# EAGLE board Simon-reference (EAGLE 7.2.0)
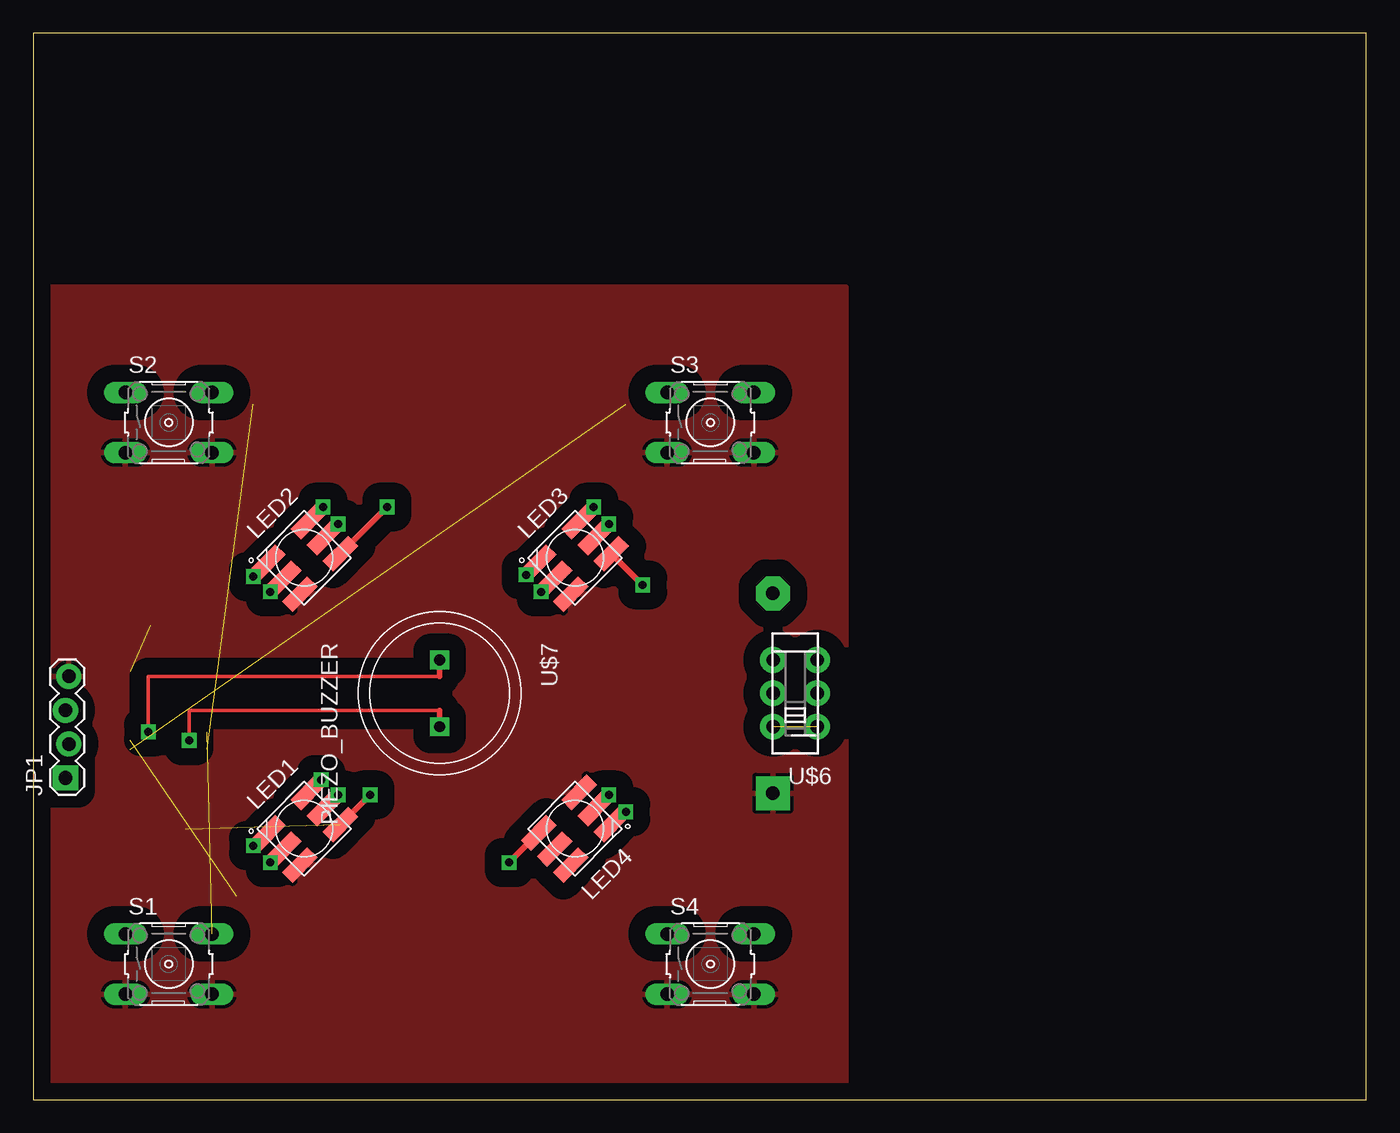
[diagram p0: board, top side]
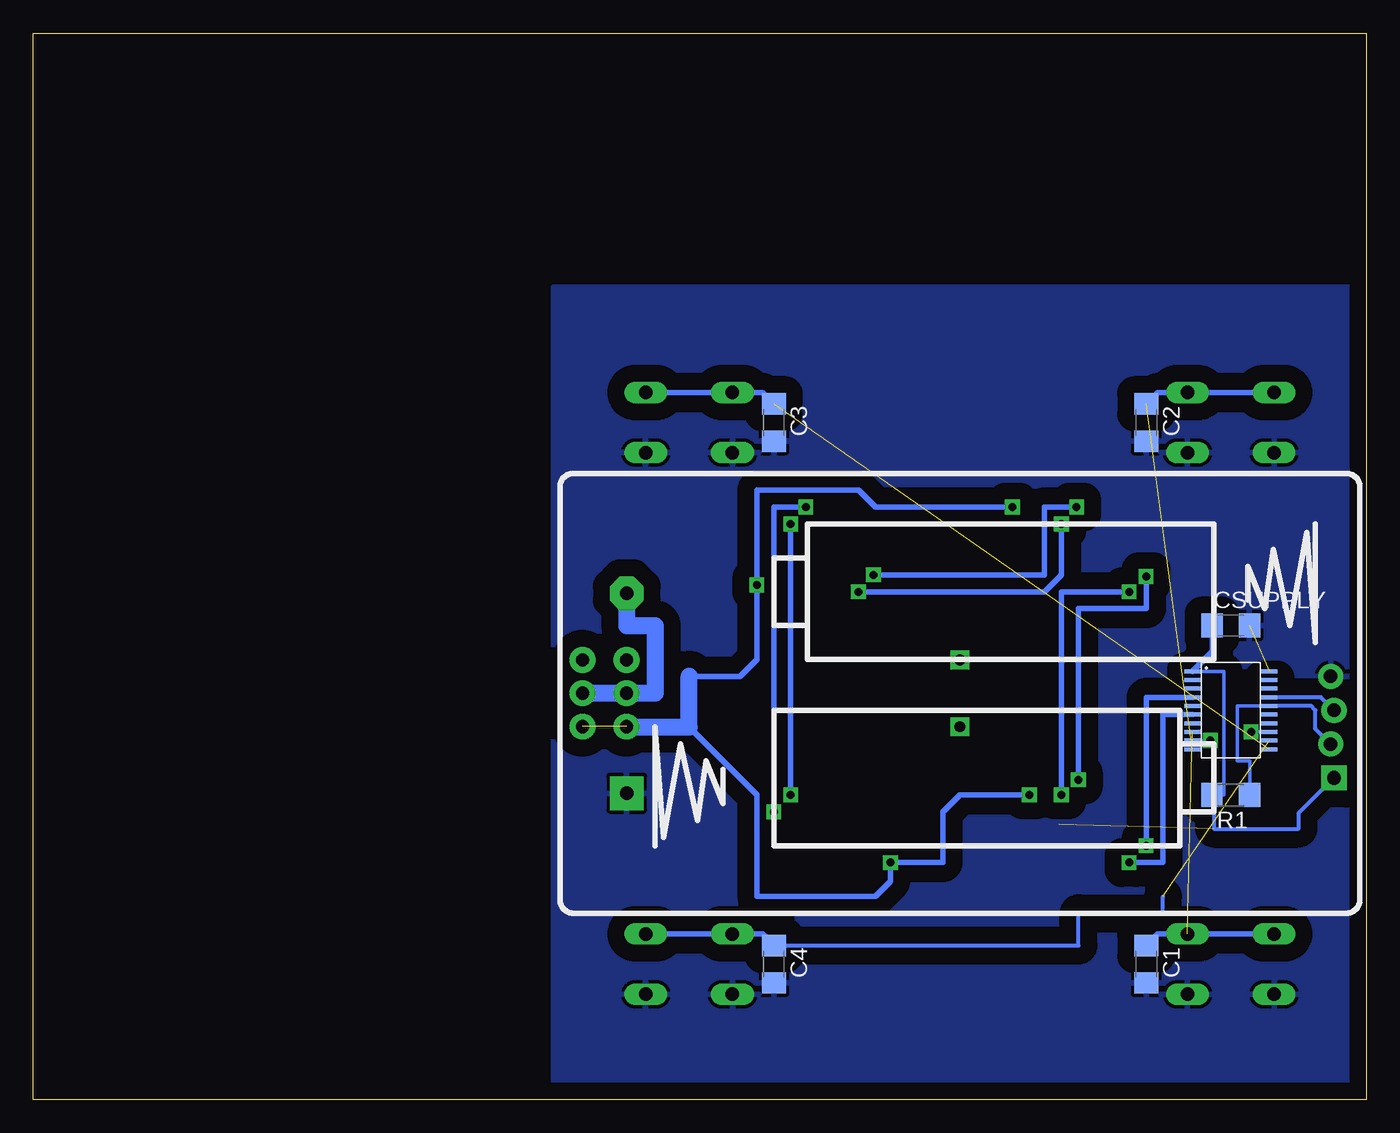
[diagram p1: board, bottom side, seen from below]

Size 100 x 80 mm. Coordinates in mm from the lower left corner, seen from the top.
Outline: 0,0 100,0 100,80 0,80 0,0
Copper layers (1*16): Top 0.035mm / dielectric 1.5mm / Bottom 0.035mm
Design rules "AdvancedCircuitsBarebones": minimum track width 6mil, minimum drill 20mil, track to track 6mil, track to pad 6mil, pad to pad 6mil, via to via 6mil, smd to smd 6mil, copper to edge 10mil, drill to drill 6mil, minimum pad ring 12mil, minimum via ring 10mil, stop-mask expansion 4mil, vias tented up to drill 25mil, thermal gap 10mil

## Footprints (pad centres in the part's own frame; a part is rotated, then mirrored left to right if it is on the bottom)
BATTERY_PACK_2AA = drill 1 pad 2.54 octagon: 3V 7.5,25 | drill 1 pad 2.54 square: GND -7.5,25
C1206 = smd 1.6 x 1.8: 1 -1.4,0; 2 1.4,0
1X04_LOCK = drill 1.016 pad 1.88 square: 1 0,0.127 | drill 1.016 pad 1.88: 2 2.54,-0.127; 3 5.08,0.127; 4 7.62,-0.127
5050 = smd 2.68 x 1.1: 1 -2.15,1.7; 2 -2.15,0; 3 -2.15,-1.7; 4 2.15,-1.7; 5 2.15,0; 6 2.15,1.7
R1206 = smd 1.6 x 1.803: 1 -1.422,0; 2 1.422,0
B3F-10XX = drill 1.016 long: 1 -3.251,2.261; 2 3.251,2.261; 3 -3.251,-2.261; 4 3.251,-2.261
PW20 = smd 0.3 x 1.2: 1 -2.925,-2.9; 2 -2.275,-2.9; 3 -1.625,-2.9; 4 -0.975,-2.9; 5 -0.325,-2.9; 6 0.325,-2.9; 7 0.975,-2.9; 8 1.625,-2.9; 9 2.275,-2.9; 10 2.925,-2.9; 11 2.925,2.9; 12 2.275,2.9; 13 1.625,2.9; 14 0.975,2.9; 15 0.325,2.9; 16 -0.325,2.9; 17 -0.975,2.9; 18 -1.625,2.9; 19 -2.275,2.9; 20 -2.925,2.9
JS_DPDT_TH = drill 1 pad 1.93: 1 -2.5,-1.65; 2 0,-1.65; 3 2.5,-1.65; 4 -2.5,1.65; 5 0,1.65; 6 2.5,1.65
PIEZO_BUZZER = drill 0.8 square: P$1 -2.5,0; P$2 2.5,0

## Placement (x,y rotation side)
BAT1  [BATTERY_PACK_2AA]  30.48,30.48 90 bottom
C1  [C1206]  16.51,10.16 270 bottom
C2  [C1206]  16.51,50.8 270 bottom
C3  [C1206]  44.45,50.8 270 bottom
C4  [C1206]  44.45,10.16 270 bottom
CSUPPLY  [C1206]  10.16,35.56 0 bottom
JP1  [1X04_LOCK]  2.54,24.13 90 top
LED1  APA102  [5050]  20.32,20.32 45 top
LED2  APA102  [5050]  20.32,40.64 45 top
LED3  APA102  [5050]  40.64,40.64 45 top
LED4  APA102  [5050]  40.64,20.32 225 top
R1  [R1206]  10.16,22.86 180 bottom
S1  [B3F-10XX]  10.16,10.16 0 top
S2  [B3F-10XX]  10.16,50.8 0 top
S3  [B3F-10XX]  50.8,50.8 0 top
S4  [B3F-10XX]  50.8,10.16 0 top
U$1  MSP430G2XX3TSSOP  [PW20]  10.16,29.21 270 bottom
U$6  SWITCH_DPDT  [JS_DPDT_TH]  57.15,30.48 90 top
U$7  PIEZO_BUZZER  [PIEZO_BUZZER]  30.48,30.48 270 top

## Library data of the parts
BAT1 LED1-LED4 U$1 U$6 U$7 = ELEC327
C1-C4 CSUPPLY = rcl
JP1 = SparkFun
R1 = resistor
S1-S4 = switch-omron; MPN: B3F-1000; OC_FARNELL: 176432; OC_NEWARK: 36M3542

## Nets
BAT_VCC: BAT1.3V U$6.2 U$6.5
GND: BAT1.GND C1.2 C2.2 C3.2 C4.2 CSUPPLY.2 JP1.4 LED1.3 LED2.3 LED3.3 LED4.3 S1.3 S1.4 S2.3 S2.4 S3.3 S3.4 S4.3 S4.4 U$1.20
N$1: LED1.6 LED2.1
N$2: LED1.5 LED2.2
N$3: LED2.6 LED3.1
N$4: LED2.5 LED3.2
N$5: LED3.6 LED4.1
N$6: LED3.5 LED4.2
N$7: LED1.1 U$1.4
N$8: LED1.2 U$1.6
N$10: U$1.9 U$7.P$2
N$11: U$1.13 U$7.P$1
N$13: C1.1 S1.1 S1.2 U$1.8
N$14: C2.1 S2.1 S2.2 U$1.10
N$15: C3.1 S3.1 S3.2 U$1.11
N$16: C4.1 S4.1 S4.2 U$1.12
RST: JP1.2 R1.1 U$1.16
TEST: JP1.3 U$1.17
VCC: CSUPPLY.1 JP1.1 LED1.4 LED2.4 LED3.4 LED4.4 R1.2 U$1.1 U$6.1 U$6.4

## Tracks (layer width: path | path; a pad name or v marks a point on that pad's centre or on a via)
BAT_VCC
  Bottom 1.27: BAT1.3V 55.48,35.56 53.34,35.56 53.34,30.48 U$6.5 U$6.2
GND  (1 unrouted)
  pour Top (isolate 1.27): 0,0 0,60.96 60.96,60.96 60.96,0
  pour Bottom (isolate 1.27): 0,60.96 60.96,60.96 60.96,0 0,0
N$1  (via drill 0.6)
  Top 0.406: LED1.6 v21.59,23.99 | LED2.1 v16.51,39.23
  Bottom 0.406: v21.59,23.99 21.59,36.83 16.51,36.83 v16.51,39.23
N$2  (via drill 0.6)
  Top 0.406: LED1.5 v22.86,22.86 | LED2.2 v17.78,38.1
  Bottom 0.406: v22.86,22.86 22.86,38.1 v17.78,38.1
N$3  (via drill 0.6)
  Top 0.406: LED2.6 v21.73,44.45 | LED3.1 v36.97,39.37
  Bottom 0.406: v36.97,39.37 24.13,39.37 24.13,44.45 v21.73,44.45
N$4  (via drill 0.6)
  Top 0.406: LED2.5 v22.86,43.18 | LED3.2 v38.1,38.1
  Bottom 0.406: v22.86,43.18 22.86,39.37 24.13,38.1 v38.1,38.1
N$5  (via drill 0.6)
  Top 0.406: LED3.6 v42.05,44.45 | v44.45,21.59 43.5,20.64 LED4.1
  Bottom 0.406: v42.05,44.45 44.45,44.45 v44.45,21.59
N$6  (via drill 0.6)
  Top 0.406: LED3.5 v43.18,43.18 | LED4.2 v43.18,22.86
  Bottom 0.406: v43.18,43.18 v43.18,22.86
N$7  (via drill 0.6)
  Top 0.406: LED1.1 16.65,19.05 v16.51,19.05
  Bottom 0.406: U$1.4 16.51,30.18 v16.51,19.05
N$8  (via drill 0.6)
  Top 0.406: LED1.2 v17.78,17.78
  Bottom 0.406: U$1.6 15.24,28.89 15.24,17.78 v17.78,17.78
N$10  (via drill 0.6)
  Top 0.254: 30.48,29.21 11.68,29.21 v11.68,26.93
  Top 0.406: U$7.P$2 30.48,29.21
  Bottom 0.254: U$1.9 v11.68,26.93
N$11  (via drill 0.6)
  Top 0.254: 30.48,31.75 8.64,31.75 v8.64,27.59
  Top 0.406: U$7.P$1 30.48,31.75
  Bottom 0.254: U$1.13 v8.64,27.59
N$13  (1 unrouted)
  Bottom 0.406: C1.1 15.65,12.42 S1.2 S1.1
N$14  (1 unrouted)
  Bottom 0.406: C2.1 15.65,53.06 S2.2 S2.1
N$15  (1 unrouted)
  Bottom 0.406: C3.1 45.31,53.06 S3.1 S3.2
N$16  (1 unrouted)
  Bottom 0.305: C4.1 21.59,11.56 21.59,13.97 15.24,13.97 15.24,15.24
  Bottom 0.406: C4.1 45.31,12.42 S4.1 S4.2
RST
  Bottom 0.254: U$1.16 9.65,29.54 9.65,25.4 8.74,25.4 R1.1
  Bottom 0.305: JP1.2 3.81,27.81 3.81,29.21 4.13,29.54 U$1.16
TEST
  Bottom 0.305: JP1.3 3.39,30.18 U$1.17
VCC  (via drill 0.6)  (2 unrouted)
  Top 0.406: LED3.4 v45.72,38.6 | LED4.4 v35.7,17.78 | LED1.4 v25.26,22.86 | LED2.4 v26.53,44.45
  Bottom 0.254: R1.2 10.67,22.86 10.67,32.13 U$1.1
  Bottom 0.305: JP1.1 5.08,21.46 5.08,20.32 11.43,20.32 11.43,22.71 R1.2
  Bottom 0.406: U$1.1 11.56,33.63 CSUPPLY.1 | 50.8,31.75 46.99,31.75 45.72,33.02 v45.72,38.6 45.72,45.72 38.1,45.72 36.83,44.45 v26.53,44.45 | 50.8,27.94 45.72,22.86 45.72,15.24 36.83,15.24 35.7,16.37 v35.7,17.78 31.75,17.78 31.75,21.59 30.48,22.86 v25.26,22.86
  Bottom 1.27: U$6.4 55.5,27.94 50.8,27.94 50.8,31.75